# Altium PCB UZ_D_DSUB_Breakout.PcbDoc
Units mm, origin at the board's own origin, x right, y up, seen from the top; angles counter-clockwise.
Board outline 155.99 x 100.01 mm, 2 copper layers (Top Layer, Bottom Layer), stack 0.91 mm thick; 7 components, 52 nets, 152 pads, 134 vias.
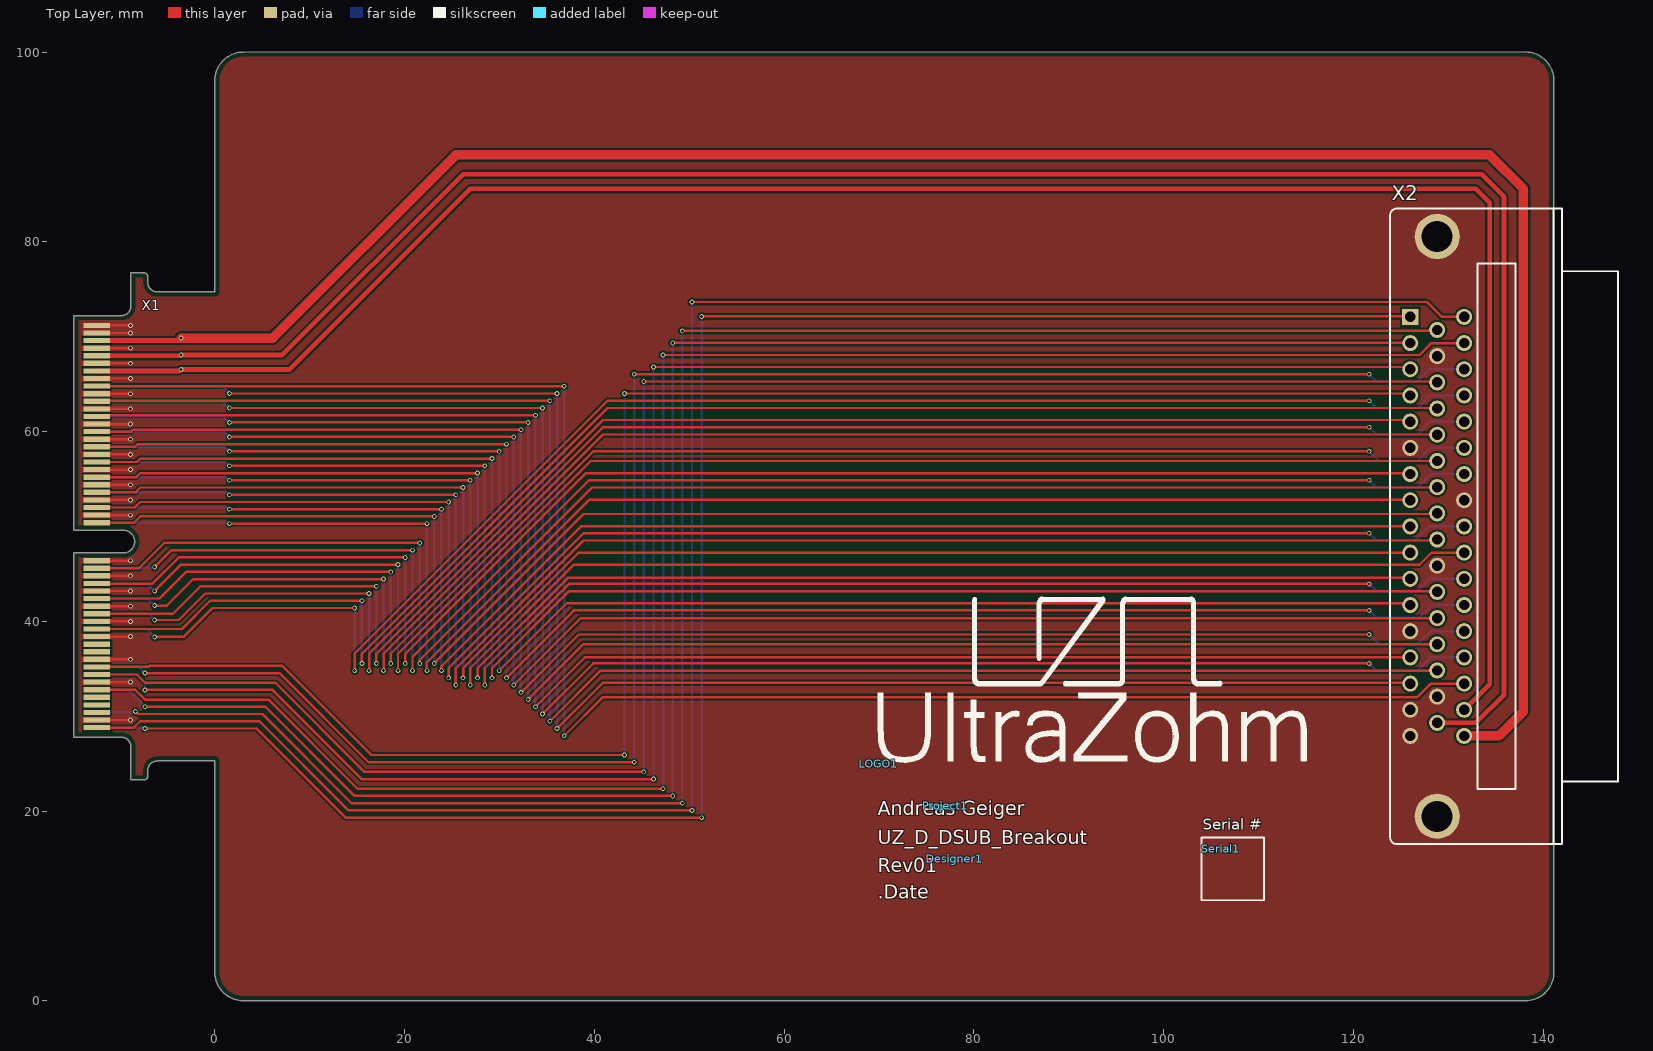
[diagram p0: Top Layer view]
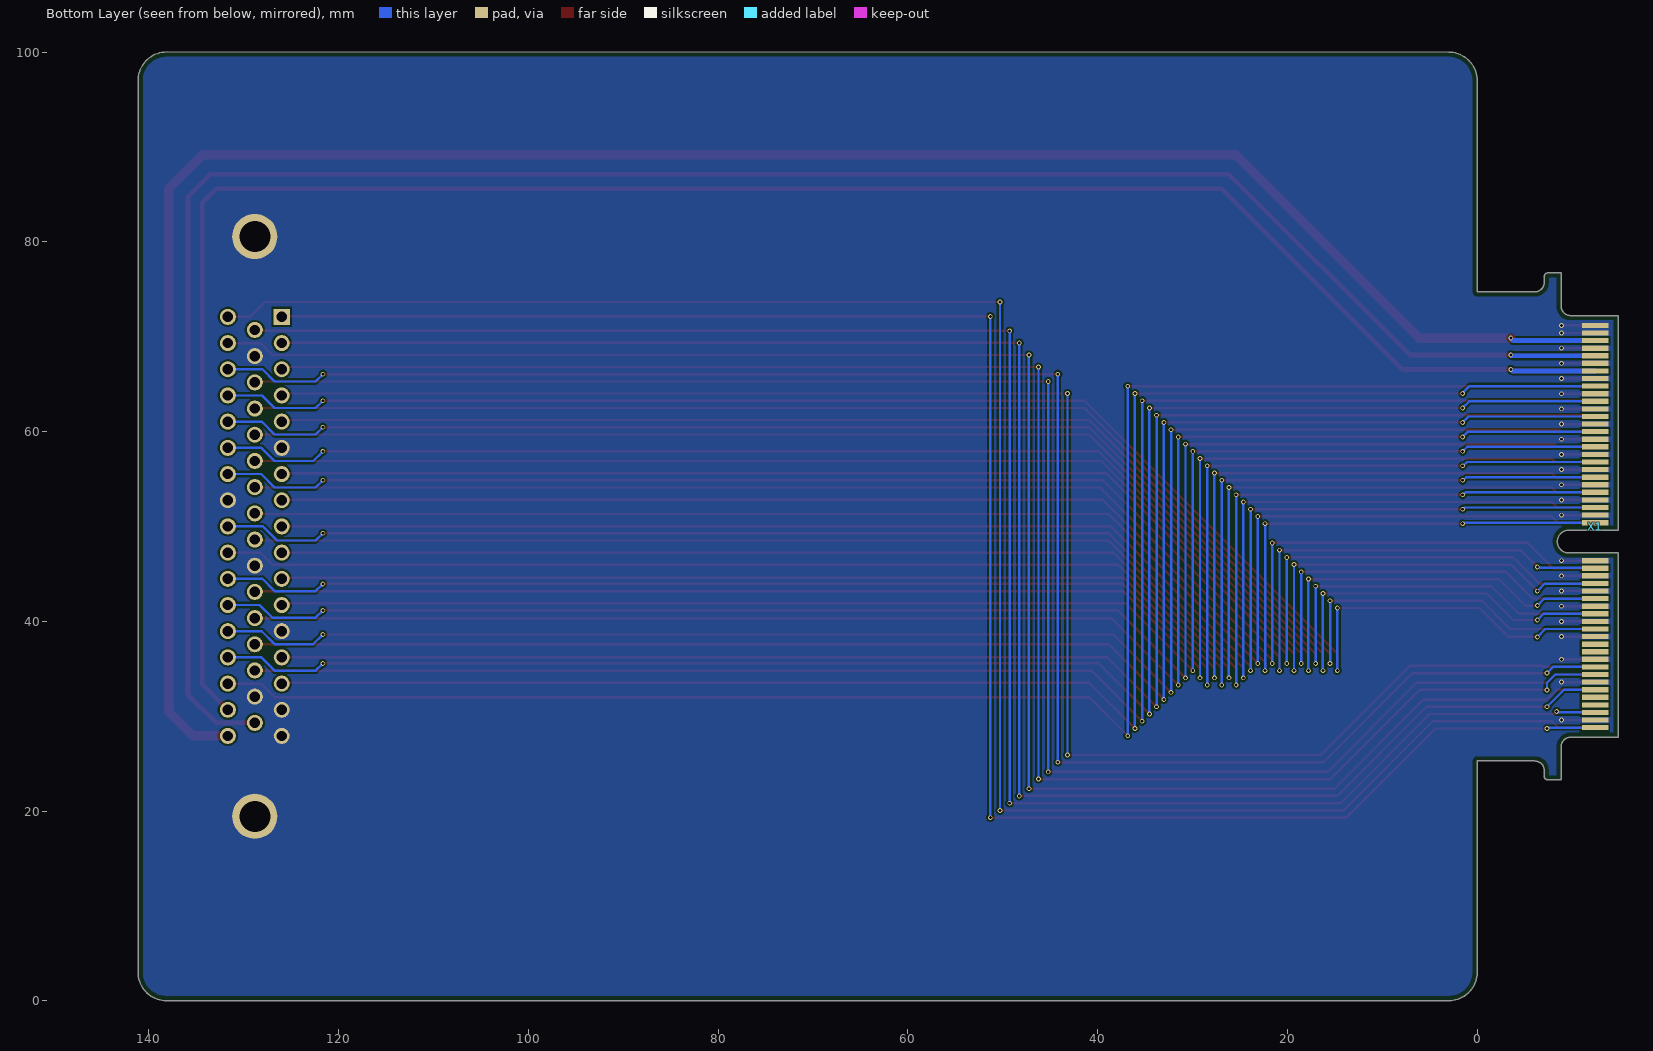
[diagram p1: Bottom Layer view, seen from below]

## Layer stack, top to bottom
Top Solder: solder mask 0.01, Solder Resist, Dk 3.5
Top Layer: signal copper 0.035
Dielectric 2: prepreg 0.115, FR-4, Dk 4.4
Dielectric 4: prepreg 0.115, FR-4, Dk 4.4
Dielectric 1: core 0.38, Core-036, Dk 4.4
Dielectric 5: prepreg 0.115, FR-4, Dk 4.4
Dielectric 3: prepreg 0.115, FR-4, Dk 4.4
Bottom Layer: signal copper 0.035
Bottom Solder: solder mask 0.01, Solder Resist, Dk 3.5

## Board outline
-14.853,27.775 -9.853,27.775 cw(c-9.853,26.775) -8.853,26.775 -8.853,23.275 -7.473,23.275 ccw(c-7.473,23.675) -7.073,23.675 -7.073,24.275 cw(c-6.073,24.275) -6.073,25.275 0,25.275 0,3 ccw(c3,3) 3,0 138.141,0 ccw(c138.141,3) 141.141,3 141.141,97 141.141,97.01 ccw(c138.141,97.01) 138.141,100.01 3,100 ccw(c3,97) 0,97 0,74.725 -6.073,74.725 cw(c-6.073,75.725) -7.073,75.725 -7.073,76.325 ccw(c-7.473,76.325) -7.473,76.725 -8.853,76.725 -8.853,73.225 cw(c-9.853,73.225) -9.853,72.225 -14.853,72.225 -14.853,49.6 -9.653,49.6 cw(c-9.653,48.4) -9.653,47.2 -14.853,47.2

## Design rules (kind name [scope] priority, off if disabled: settings)
BoardOutlineClearance BoardOutlineClearance_TopOverlay [OnLayer('Top Overlay') or OnLayer('Bottom Overlay')] p1: gap=0 ignorepadtopadclearanceinfootprint=FALSE
BoardOutlineClearance [All] p2: gap=0.508 ignorepadtopadclearanceinfootprint=FALSE except(0: Arc-SplitContinuation Track-SplitContinuation SMDPad-SplitContinuation THPad-SplitContinuation Via-SplitContinuation Fill-SplitContinuation Poly-SplitContinuation Region-SplitContinuation Text-OutlineEdge Text-CavityEdge Text-CutoutEdge Text-SplitBarrior Text-SplitContinuation; 0.254: SMDPad-OutlineEdge SMDPad-CavityEdge SMDPad-CutoutEdge SMDPad-SplitBarrior)
Clearance [All] p1: gap=0.2 ignorepadtopadclearanceinfootprint=FALSE except(0: Arc-Text Track-Text SMDPad-Text THPad-Text Via-Text Fill-Text Poly-Text Region-Text Text-Text Text-Hole; 0.127: Arc-Arc Arc-Track Track-Track SMDPad-SMDPad; 0.254: Arc-Via Track-Via; 0.5: THPad-THPad Via-Via)
ComponentClearance [All] p1: gap=0 collisioncheckmode=3 verticalgap=0 showdistances=FALSE
DiffPairsRouting [All] p1: maxlimit=0.127 minlimit=0.127 mostfreqgap=0.127 toplayer_minwidth=0.254 toplayer_maxwidth=0.254 toplayer_prefwidth=0.254 bottomlayer_minwidth=0.254 bottomlayer_maxwidth=0.254 bottomlayer_prefwidth=0.254 impedanceprofiledriven=TRUE impedanceprofileid={1E899714-F215-421E-BD83-15DB56C979E2} maxuncoupledlength=12.7
HoleSize [All] p1: absolutevalues=TRUE maxlimit=6.3 minlimit=0.2 maxpercent=80.000 minpercent=20.000
MatchedLengths [All] p1: tolerance=0.254 checknetsindiffpair=TRUE checkdiffpairvsdiffpair=FALSE checkxsignals=FALSE checkothers=FALSE
MinimumSolderMaskSliver [All] p1: minsoldermaskwidth=0.089
PlaneConnect [All] p1: pad.planeconnectstyle=Relief pad.reliefexpansion=0.508 pad.reliefentries=4 pad.reliefconductorwidth=0.254 pad.reliefairgap=0.254 via.planeconnectstyle=Direct via.reliefexpansion=0.508 via.reliefentries=4 via.reliefconductorwidth=0.254 via.reliefairgap=0.254
PolygonConnect PolygonConnect_GND [InNet('GND')] p1 off: thpad.connectstyle=Relief thpad.reliefconductorwidth=0.254 thpad.reliefentries=4 thpad.polygonreliefangle="90 Angle" thpad.airgapwidth=0.254 smdpad.connectstyle=Relief smdpad.reliefconductorwidth=0.254 smdpad.reliefentries=4 smdpad.polygonreliefangle="90 Angle" smdpad.airgapwidth=0.254 via.connectstyle=Direct via.reliefconductorwidth=0.254 via.reliefentries=4 via.polygonreliefangle="90 Angle" via.airgapwidth=0.254
PolygonConnect [All] p2: connectstyle=Direct reliefconductorwidth=0.254 reliefentries=4 polygonreliefangle="90 Angle" airgapwidth=0.127
RoomDefinition Component_UpperEdgeKeepOut [All] p1: confinementstyle=ConfineOut formatcopy=TRUE lockcomponents=FALSE outline 0,97 142,97 142,100 0,100
RoomDefinition Component_LowerEdgeKeepOut [All] p2: confinementstyle=ConfineOut formatcopy=TRUE lockcomponents=FALSE outline 0,0 142,0 142,3 0,3
RoutingVias [All] p1: holewidth=0.3 width=0.6 viastyle="Through Hole" minholewidth=0.2 minwidth=0.4 maxholewidth=0.8 maxwidth=1.6
SilkToSilkClearance [All] p1: silktosilkclearance=0
SilkToSolderMaskClearance [IsPad] p1: minsilkscreentomaskgap=0 clearancetoexposedcopper=TRUE
SolderMaskExpansion [All] p1: expansion=0.102 istentingtop=FALSE
Width width_s75 [InNetClass('S75')] p1 off: maxlimit=0.1 minlimit=0.1 preferedwidth=0.1 minimp=50.000000 maximp=50.000000 favimp=50.000000
Width [All] p2: maxlimit=10 minlimit=0.2 preferedwidth=0.254 minimp=50.000000 maximp=50.000000 favimp=50.000000
23 further rules are at their usual default settings.

## Classes and differential pairs
component class TopSheet: Designer1 LOGO1 Project1 Revision1 Serial1
component class U_DigitalConnector: X2
component class X1: X1

## Components (designator, comment, footprint, x,y, rotation, side; value= is the part's Value field where it differs from the comment)
Designer1 "Andreas Geiger" Designator:comment 77.978,14.986 r0 top
LOGO1 "UZ Logo" UZ_Logo_medium 70,25 r0 top
Project1 "UZ_D_DSUB_Breakout" COMMENT 76.962,20.574 r0 top
Revision1 "Rev01" Designator:comment 170.695,25.971 r90 top
Serial1 "Serial #" SERIAL 106,16 r0 top
X1 "HSEC8-150-01-XX-DV-A-BL-CARD" HSEC8-150-01-XX-DV-A-BL-CARD -14.84,49.991 r270 bottom
X2 "164A18759X" dsub50_female_164A18759X 126,27.912 r90 top

## Footprints (in the part's own frame and the unit in brackets; to place one, negate y for a bottom-side part, rotate by r counter-clockwise, add the part's x,y. Pads: shape width x height; smd on the part's side, far side on the other; paste and mask are expansions set on the pad)
COMMENT [mm] "prints out the comment of a component"
Designator:comment [mm] "prints out designator and comment of a component"
dsub50_female_164A18759X [mm]
  rect 1.69x1.69 hole 1.09: 1(44.176,0)
  round 1.69 hole 1.09: 2(41.415,0) 3(38.654,0) 4(35.893,0) 5(33.132,0) 6(30.371,0) 7(27.61,0) 8(24.849,0) 9(22.088,0) 10(19.327,0) 11(16.566,0) 12(13.805,0) 13(11.044,0) 14(8.283,0) 15(5.522,0) 16(2.761,0) 17(0,0) 18(42.795,-2.84) 19(40.035,-2.84) 20(37.274,-2.84) 21(34.512,-2.84) 22(31.752,-2.84) 23(28.99,-2.84) 24(26.23,-2.84) 25(23.469,-2.84) 26(20.707,-2.84) 27(17.947,-2.84) 28(15.185,-2.84) 29(12.425,-2.84) 30(9.664,-2.84) 31(6.902,-2.84) 32(4.142,-2.84) 33(1.38,-2.84) 34(44.176,-5.68) 35(41.415,-5.68) 36(38.654,-5.68) 37(35.893,-5.68) 38(33.132,-5.68) 39(30.371,-5.68) 40(27.61,-5.68) 41(24.849,-5.68) 42(22.088,-5.68) 43(19.327,-5.68) 44(16.566,-5.68) 45(13.805,-5.68) 46(11.044,-5.68) 47(8.283,-5.68) 48(5.522,-5.68) 49(2.761,-5.68) 50(0,-5.68)
  round 4.76 hole 3.26: 51(-8.467,-2.84) 52(52.643,-2.84)
  silkscreen extent -11.4,-21.9 55.6,2.12, body extent -11.42,-22.05 55.58,2.13, height 16.35
HSEC8-150-01-XX-DV-A-BL-CARD [mm]
  rect 0.55x2.8 smd far side mask+0.05: 1(-21.2,-2.4) 3(-20.4,-2.4) 5(-19.6,-2.4) 7(-18.8,-2.4) 9(-18,-2.4) 11(-17.2,-2.4) 13(-16.4,-2.4) 15(-15.6,-2.4) 17(-14.8,-2.4) 19(-14,-2.4) 21(-13.2,-2.4) 23(-12.4,-2.4) 25(-11.6,-2.4) 27(-10.8,-2.4) 29(-10,-2.4) 31(-9.2,-2.4) 33(-8.4,-2.4) 35(-7.6,-2.4) 37(-6.8,-2.4) 39(-6,-2.4) 41(-5.2,-2.4) 43(-4.4,-2.4) 45(-3.6,-2.4) 47(-2.8,-2.4) 49(-2,-2.4) 51(-1.2,-2.4) 53(-0.4,-2.4) 55(3.6,-2.4) 57(4.4,-2.4) 59(5.2,-2.4) 61(6,-2.4) 63(6.8,-2.4) 65(7.6,-2.4) 67(8.4,-2.4) 69(9.2,-2.4) 71(10,-2.4) 73(10.8,-2.4) 75(11.6,-2.4) 77(12.4,-2.4) 79(13.2,-2.4) 81(14,-2.4) 83(14.8,-2.4) 85(15.6,-2.4) 87(16.4,-2.4) 89(17.2,-2.4) 91(18,-2.4) 93(18.8,-2.4) 95(19.6,-2.4) 97(20.4,-2.4) 99(21.2,-2.4)
  rect 0.55x2.8 smd mask+0.05: 2(-21.2,-2.4) 4(-20.4,-2.4) 6(-19.6,-2.4) 8(-18.8,-2.4) 10(-18,-2.4) 12(-17.2,-2.4) 14(-16.4,-2.4) 16(-15.6,-2.4) 18(-14.8,-2.4) 20(-14,-2.4) 22(-13.2,-2.4) 24(-12.4,-2.4) 26(-11.6,-2.4) 28(-10.8,-2.4) 30(-10,-2.4) 32(-9.2,-2.4) 34(-8.4,-2.4) 36(-7.6,-2.4) 38(-6.8,-2.4) 40(-6,-2.4) 42(-5.2,-2.4) 44(-4.4,-2.4) 46(-3.6,-2.4) 48(-2.8,-2.4) 50(-2,-2.4) 52(-1.2,-2.4) 54(-0.4,-2.4) 56(3.6,-2.4) 58(4.4,-2.4) 60(5.2,-2.4) 62(6,-2.4) 64(6.8,-2.4) 66(7.6,-2.4) 68(8.4,-2.4) 70(9.2,-2.4) 72(10,-2.4) 74(10.8,-2.4) 76(11.6,-2.4) 78(12.4,-2.4) 80(13.2,-2.4) 82(14,-2.4) 84(14.8,-2.4) 86(15.6,-2.4) 88(16.4,-2.4) 90(17.2,-2.4) 92(18,-2.4) 94(18.8,-2.4) 96(19.6,-2.4) 98(20.4,-2.4) 100(21.2,-2.4)
SERIAL [mm]
  silkscreen extent -2,-5.4 4.6,1.2
UZ_Logo_medium [mm] "logo width 4.5cm"
  silkscreen extent -0.1,0.17 45.04,17.54

## Part data
Designer1: library part 4, "Create a project parameter named \"Author\" this is the value of this component. It is printed on the PCB. Once the parameter is updated (e.g. new revision) it gets updated on the PCB as well", Manufacturer="PCB Manufacturer", Manufacturer Part Number="Project Author", Component Type="Project Author", Created from="T. Wendt", Created On="01.03.2021 08:53:41", Last Updated="01.03.2021 09:20:27", Live Cycle Status=1, PartID=4, Type="Standard (No BOM)"
LOGO1: library part 1, "Official Project Logo of the UltraZohm", Manufacturer="PCB Manufacturer", Manufacturer Part Number="UltraZohm Logo", Component Type=Logo, ComponentLink1Description=Homepage, ComponentLink1URL=https://ultrazohm.com, Created from="T. Wendt", Created On="19.02.2021 16:55:56", Last Updated="02.03.2021 14:31:24", Live Cycle Status=1, PartID=1, Type="Standard (No BOM)"
Project1: library part 2, "Create a project parameter named \"ProjectNameCustom\" this is the value of this component and it is printed on the PCB.", Manufacturer="PCB Manufacturer", Manufacturer Part Number="Project Name", Component Type="Project Name", Created from="T. Wendt", Created On="01.03.2021 08:43:57", Last Updated="01.03.2021 09:07:27", Live Cycle Status=1, PartID=2, Type="Standard (No BOM)"
Revision1: library part 3, "Create a project parameter named \"ProjectRevision\" this is the value of this component. It is printed on the PCB. Once the parameter is updated (e.g. new revision) it gets updated on the PCB as well", Manufacturer="PCB Manufacturer", Manufacturer Part Number="Project Revision", Component Type="Project Revision", Created from="T. Wendt", Created On="01.03.2021 08:50:34", Last Updated="01.03.2021 09:28:36", Live Cycle Status=1, PartID=3, Type="Standard (No BOM)"
Serial1: library part 6, "Field to put in a serial number", Manufacturer="PCB Manufacturer", Manufacturer Part Number="Serial Number", Component Type="Serial Number", Created from="T. Wendt", Created On="02.03.2021 14:31:24", Last Updated="02.03.2021 14:31:24", Live Cycle Status=1, PartID=6, Type="Standard (No BOM)"
X1: "Mating Card Layout for HSEC8-150-01-XX-DV-A-BL", Device Package="PCB Shape", Manufacturer=SAMTEC, Supplier Part Number 1=NA, Category=SAMTEC, Component Type="Board to Board Connector", ComponentLink1Description=Homepage, ComponentLink1URL=https://www.samtec.com/products/hsec8-dp, Created=2018_04_23_AGeiger, Created from="T. Wendt", Created On="26.02.2021 16:36:12", Last Updated="26.02.2021 16:37:20", Live Cycle Status=1, Manufacturer Part Number=HSEC8-150-01-XX-DV-A-BL-CARD, Mounting Type="PCB Shape", Number of positions=100, Number of rows=2, PartID=2, Series=HSEC8, Stock number="not stored", Supplier 1=SAMTEC, Type="Board to Board Connector"
X2: "D-Sub Standard Connectors DSUB SOLDER PIN ANG 9.4mm", Manufacturer=CONEC, Operating Temperature="-55 °C to +125 °C", Supplier Part Number 1="D-SUB BU 50GWC", ComponentLink1Description=Datasheet, ComponentLink1URL=https://conec.com/catalog/pub/media/conec/drawings/164A18759X.pdf, Created=2019_10_24_AGeiger, Created from=AGeiger, Created On="22.12.2022 17:03:01", Last Updated="22.12.2022 17:05:07", Manufacturer Part Number=164A18759X, MF=CONEC, Mounting Type=THT, MPN=164A18759X, PartID=2, Series="D-SUB Standard", Supplier 1=Reichelt, Supplier 2=Mouser, Supplier 3=Digi-Key, Supplier Part Number 2=706-164A18759X, Supplier Part Number 3=164A18759X-ND

## Via types
v1: diameter 0.5, hole 0.3, Top Layer to Bottom Layer, 134 vias

## Nets (pads, with @x,y where several pads share a name; then routed paths per layer and width w, separated by ;. In a path a pad name is that pad's centre, name@x,y a point inside that pad or via, vN(x,y) a via of type N, cw(c..) or ccw(c..) an arc to the next point about the centre after c; other vN are vias at no path point)
3V3_PER: X1.13 X1.14 X2.49 | length 218.9
  Top Layer w0.5: X1.13 -3.713,66.391 v1(-3.556,66.548) 7.874,66.548 26.924,85.598 132.893,85.598 134.366,84.125 134.366,33.359 X2.49
  Bottom Layer w0.5: X1.14 -3.713,66.391 v1(-3.556,66.548)
5V_PER: X1.9 X1.10 X2.33 | length 226.9
  Top Layer w0.5: X1.9 -3.637,67.991 v1(-3.556,68.072) 7.112,68.072 26.162,87.122 133.524,87.122 135.89,84.756 135.89,32.258 132.924,29.292 X2.33
  Bottom Layer w0.5: X1.10 -3.637,67.991 v1(-3.556,68.072)
Collective_FLT: X1.96 X2.18 | length 195.1
  Top Layer w0.254: v1(-8.382,30.48) -8.364,30.48 -8.11,30.226 5.008,30.226 14.406,20.828 v1(49.276,20.828) ; v1(49.276,70.612) 128.744,70.612 X2.18
  Bottom Layer w0.254: X1.96 -8.538,30.391 -8.449,30.48 v1(-8.382,30.48) ; v1(49.276,20.828) 49.276,61.976 v1(49.276,70.612)
CPLD_DigIn_01: X1.83 X2.4 | length 180.6
  Top Layer w0.254: X1.83 -6.973,35.191 -6.858,35.306 7.112,35.306 16.51,25.908 v1(43.18,25.908) ; v1(43.18,64.008) 82.55,64.008 125.797,64.008 X2.4
  Bottom Layer w0.254: v1(43.18,25.908) v1(43.18,64.008)
CPLD_DigIn_02: X1.85 X2.20 | length 186.7
  Top Layer w0.254: X1.85 -8.229,34.391 -7.366,33.528 6.376,33.528 15.774,24.13 v1(45.212,24.13) ; v1(45.212,65.278) 128.748,65.278 X2.20
  Bottom Layer w0.254: v1(45.212,24.13) 45.212,61.976 v1(45.212,65.278)
CPLD_DigOut_01: X1.84 X2.36 | length 190
  Top Layer w0.254: v1(-7.366,34.544) 6.796,34.544 16.194,25.146 v1(44.196,25.146) ; v1(44.196,66.04) v1(121.666,66.04)
  Bottom Layer w0.254: X1.84 -8.013,35.191 v1(-7.366,34.544) ; v1(44.196,25.146) 44.196,61.976 v1(44.196,66.04) ; v1(121.666,66.04) 122.428,65.278 126.746,65.278 128.034,66.566 X2.36
CPLD_DigOut_02: X1.86 X2.3 | length 187
  Top Layer w0.254: v1(-7.366,32.766) 6.06,32.766 15.458,23.368 v1(46.228,23.368) ; v1(46.228,66.802) 125.764,66.802 X2.3
  Bottom Layer w0.254: X1.86 -8.229,34.391 -7.366,33.528 v1(-7.366,32.766) ; v1(46.228,23.368) 46.228,61.976 v1(46.228,66.802)
DIG_IO_00: X1.17 X2.48 | length 183.2
  Top Layer w0.254: X1.17 36.809,64.791 v1(36.83,64.77) ; v1(36.83,27.94) 40.894,32.004 82.55,32.004 126.746,32.004 128.176,33.434 X2.48
  Bottom Layer w0.254: v1(36.83,27.94) v1(36.83,64.77)
DIG_IO_01: X1.18 X2.15 | length 176.1
  Top Layer w0.254: v1(1.524,64.008) v1(36.068,64.008) ; v1(36.068,28.702) 40.894,33.528 82.55,33.528 125.906,33.528 X2.15
  Bottom Layer w0.254: X1.18 0.808,64.791 1.524,64.075 v1(1.524,64.008) ; v1(36.068,28.702) v1(36.068,64.008)
DIG_IO_02: X1.21 X2.31 | length 177.3
  Top Layer w0.254: X1.21 -12.385,63.246 v1(35.306,63.246) ; v1(35.306,29.464) 40.64,34.798 82.55,34.798 128.823,34.798 X2.31
  Bottom Layer w0.254: v1(35.306,29.464) v1(35.306,63.246)
DIG_IO_03: X1.22 X2.47 | length 179.8
  Top Layer w0.254: v1(1.524,62.484) v1(34.544,62.484) ; v1(34.544,30.226) 39.878,35.56 82.55,35.56 v1(121.666,35.56)
  Bottom Layer w0.254: X1.22 0.817,63.191 v1(1.524,62.484) ; v1(34.544,30.226) v1(34.544,62.484) ; v1(121.666,35.56) 122.428,34.798 126.746,34.798 128.143,36.195 X2.47
DIG_IO_04: X1.25 X2.14 | length 171.4
  Top Layer w0.254: X1.25 -12.309,61.722 v1(33.782,61.722) ; v1(33.782,30.988) 38.989,36.195 X2.14
  Bottom Layer w0.254: v1(33.782,30.988) v1(33.782,61.722)
DIG_IO_05: X1.26 X2.30 | length 173.2
  Top Layer w0.254: v1(1.524,60.96) v1(33.02,60.96) ; v1(33.02,31.75) 38.862,37.592 128.824,37.592 X2.30
  Bottom Layer w0.254: X1.26 0.893,61.591 v1(1.524,60.96) ; v1(33.02,31.75) v1(33.02,60.96)
DIG_IO_06: X1.29 X2.46 | length 175.4
  Top Layer w0.254: X1.29 -8.836,59.991 -8.629,60.198 v1(32.258,60.198) ; v1(32.258,32.512) 38.354,38.608 v1(121.666,38.608)
  Bottom Layer w0.254: v1(32.258,32.512) v1(32.258,60.198) ; v1(121.666,38.608) 122.682,37.592 126.746,37.592 128.11,38.956 X2.46
DIG_IO_07: X1.30 X2.29 | length 170.6
  Top Layer w0.254: v1(1.524,59.436) v1(31.496,59.436) ; v1(31.496,33.274) 38.559,40.337 X2.29
  Bottom Layer w0.254: X1.30 0.969,59.991 v1(1.524,59.436) ; v1(31.496,33.274) v1(31.496,59.436)
DIG_IO_08: X1.33 X2.45 | length 172.7
  Top Layer w0.254: X1.33 -8.411,58.391 -8.128,58.674 v1(30.734,58.674) ; v1(30.734,34.036) 37.846,41.148 v1(121.666,41.148)
  Bottom Layer w0.254: v1(30.734,34.036) v1(30.734,58.674) ; v1(121.666,41.148) 122.428,40.386 127,40.386 128.331,41.717 X2.45
DIG_IO_09: X1.34 X2.12 | length 164.8
  Top Layer w0.254: v1(1.524,57.912) v1(29.972,57.912) ; v1(29.972,34.798) 37.084,41.91 125.807,41.91 X2.12
  Bottom Layer w0.254: X1.34 1.045,58.391 v1(1.524,57.912) ; v1(29.972,34.798) v1(29.972,57.912)
DIG_IO_10: X1.37 X2.28 | length 169
  Top Layer w0.254: X1.37 -8.233,56.791 -7.874,57.15 v1(29.21,57.15) ; v1(29.21,34.036) 29.21,35.052 37.338,43.18 128.757,43.18 X2.28
  Bottom Layer w0.254: v1(29.21,34.036) v1(29.21,57.15)
DIG_IO_11: X1.38 X2.44 | length 173.7
  Top Layer w0.254: v1(1.524,56.388) v1(28.448,56.388) ; v1(28.448,33.274) 28.448,35.052 37.338,43.942 v1(121.666,43.942)
  Bottom Layer w0.254: X1.38 1.054,56.791 1.457,56.388 v1(1.524,56.388) ; v1(28.448,33.274) v1(28.448,56.388) ; v1(121.666,43.942) 122.428,43.18 126.746,43.18 128.044,44.478 X2.44
DIG_IO_12: X1.41 X2.11 | length 165.2
  Top Layer w0.254: X1.41 -8.309,55.191 -7.874,55.626 v1(27.686,55.626) ; v1(27.686,34.036) 27.686,35.052 37.207,44.573 125.905,44.573 X2.11
  Bottom Layer w0.254: v1(27.686,34.036) v1(27.686,55.626)
DIG_IO_13: X1.42 X2.43 | length 172.7
  Top Layer w0.254: v1(1.524,54.864) v1(26.924,54.864) ; v1(26.924,33.274) 26.924,35.052 37.846,45.974 127,45.974 128.265,47.239 X2.43
  Bottom Layer w0.254: X1.42 1.13,55.191 1.457,54.864 v1(1.524,54.864) ; v1(26.924,33.274) v1(26.924,54.864)
DIG_IO_14: X1.45 X2.10 | length 164.8
  Top Layer w0.254: X1.45 -8.385,53.591 -7.874,54.102 v1(26.162,54.102) ; v1(26.162,34.036) 26.162,35.052 38.354,47.244 125.995,47.244 X2.10
  Bottom Layer w0.254: v1(26.162,34.036) v1(26.162,54.102)
DIG_IO_15: X1.46 X2.26 | length 168.8
  Top Layer w0.254: v1(1.524,53.34) v1(25.4,53.34) ; v1(25.4,33.274) 25.4,35.052 38.862,48.514 128.734,48.514 X2.26
  Bottom Layer w0.254: X1.46 1.206,53.591 1.457,53.34 v1(1.524,53.34) ; v1(25.4,33.274) v1(25.4,53.34)
DIG_IO_16: X1.49 X2.42 | length 170.7
  Top Layer w0.254: X1.49 -8.461,51.991 -7.874,52.578 v1(24.638,52.578) ; v1(24.638,34.036) 24.638,35.052 38.862,49.276 v1(121.666,49.276)
  Bottom Layer w0.254: v1(24.638,34.036) v1(24.638,52.578) ; v1(121.666,49.276) 122.428,48.514 126.492,48.514 127.978,50 X2.42
DIG_IO_17: X1.50 X2.9 | length 162.1
  Top Layer w0.254: v1(1.524,51.816) v1(23.876,51.816) ; v1(23.876,34.798) 23.876,35.255 38.659,50.038 125.962,50.038 X2.9
  Bottom Layer w0.254: X1.50 1.282,51.991 1.457,51.816 v1(1.524,51.816) ; v1(23.876,34.798) v1(23.876,51.816)
DIG_IO_18: X1.53 X2.25 | length 163.6
  Top Layer w0.254: X1.53 -8.537,50.391 -7.874,51.054 v1(23.114,51.054) ; v1(23.114,35.56) 38.862,51.308 128.767,51.308 X2.25
  Bottom Layer w0.254: v1(23.114,35.56) v1(23.114,51.054)
DIG_IO_19: X1.54 X2.8 | length 162
  Top Layer w0.254: v1(1.524,50.292) v1(22.352,50.292) ; v1(22.352,34.798) 22.352,35.69 39.494,52.832 125.929,52.832 X2.8
  Bottom Layer w0.254: X1.54 1.358,50.391 1.457,50.292 v1(1.524,50.292) ; v1(22.352,34.798) v1(22.352,50.292)
DIG_IO_20: X1.57 X2.24 | length 163
  Top Layer w0.254: X1.57 -8.003,45.591 -5.334,48.26 v1(21.59,48.26) ; v1(21.59,35.56) 21.599,35.569 21.599,35.936 24.074,38.41 39.765,54.102 128.8,54.102 X2.24
  Bottom Layer w0.254: v1(21.59,35.56) v1(21.59,48.26)
DIG_IO_21: X1.58 X2.40 | length 167.7
  Top Layer w0.254: v1(-6.35,45.72) -4.572,47.498 v1(20.828,47.498) ; v1(20.828,34.798) 20.828,36.242 23.535,38.949 39.45,54.864 v1(121.666,54.864)
  Bottom Layer w0.254: X1.58 -12.373,45.658 -6.478,45.658 -6.417,45.72 v1(-6.35,45.72) ; v1(20.828,34.798) v1(20.828,47.498) ; v1(121.666,54.864) 122.428,54.102 126.746,54.102 128.166,55.522 X2.40
DIG_IO_22: X1.61 X2.7 | length 159.7
  Top Layer w0.254: X1.61 -12.416,43.966 -6.58,43.966 -3.81,46.736 v1(20.066,46.736) ; v1(20.066,35.56) 20.066,36.558 22.996,39.488 39.134,55.626 125.896,55.626 X2.7
  Bottom Layer w0.254: v1(20.066,35.56) v1(20.066,46.736)
DIG_IO_23: X1.62 X2.23 | length 164.1
  Top Layer w0.254: v1(-6.35,43.18) -3.556,45.974 v1(19.304,45.974) ; v1(19.304,34.798) 19.304,36.576 39.624,56.896 128.833,56.896 X2.23
  Bottom Layer w0.254: X1.62 -12.416,43.966 -7.136,43.966 v1(-6.35,43.18) ; v1(19.304,34.798) v1(19.304,45.974)
DIG_IO_24: X1.65 X2.39 | length 165.8
  Top Layer w0.254: X1.65 -12.427,42.404 -5.856,42.404 -3.048,45.212 v1(18.542,45.212) ; v1(18.542,35.56) 18.542,36.576 39.878,57.912 v1(121.666,57.912)
  Bottom Layer w0.254: v1(18.542,35.56) v1(18.542,45.212) ; v1(121.666,57.912) 122.682,56.896 126.746,56.896 128.133,58.283 X2.39
DIG_IO_25: X1.66 X2.22 | length 163.8
  Top Layer w0.254: v1(-6.35,41.656) -5.08,41.656 -2.286,44.45 v1(17.78,44.45) ; v1(17.78,34.798) 17.78,36.576 40.894,59.69 128.813,59.69 X2.22
  Bottom Layer w0.254: X1.66 -7.085,42.391 v1(-6.35,41.656) ; v1(17.78,34.798) v1(17.78,44.45)
DIG_IO_26: X1.69 X2.38 | length 165.2
  Top Layer w0.254: X1.69 -4.421,40.791 -1.524,43.688 v1(17.018,43.688) ; v1(17.018,35.56) 17.018,36.576 40.894,60.452 v1(121.666,60.452)
  Bottom Layer w0.254: v1(17.018,35.56) v1(17.018,43.688) ; v1(121.666,60.452) 122.428,59.69 126.746,59.69 128.1,61.044 X2.38
DIG_IO_27: X1.70 X2.5 | length 160.1
  Top Layer w0.254: v1(-6.35,40.132) -3.81,40.132 -1.016,42.926 v1(16.256,42.926) ; v1(16.256,34.798) 16.256,36.576 40.894,61.214 125.83,61.214 X2.5
  Bottom Layer w0.254: X1.70 -7.009,40.791 v1(-6.35,40.132) ; v1(16.256,34.798) v1(16.256,42.926)
DIG_IO_28: X1.73 X2.21 | length 160.9
  Top Layer w0.254: X1.73 -3.481,39.191 -0.508,42.164 v1(15.494,42.164) ; v1(15.494,35.56) 15.494,36.576 41.402,62.484 128.78,62.484 X2.21
  Bottom Layer w0.254: v1(15.494,35.56) v1(15.494,42.164)
DIG_IO_29: X1.74 X2.37 | length 166
  Top Layer w0.254: v1(-6.35,38.354) -3.302,38.354 -0.254,41.402 v1(14.732,41.402) ; v1(14.732,34.798) 14.732,36.576 41.402,63.246 v1(121.666,63.246)
  Bottom Layer w0.254: X1.74 -7.187,39.191 v1(-6.35,38.354) ; v1(14.732,34.798) v1(14.732,41.402) ; v1(121.666,63.246) 122.428,62.484 126.746,62.484 128.067,63.805 X2.37
DIG_Res_00: X1.78
DIG_Res_01: X1.79
DIG_Res_02: X1.80
DIG_Res_03: X1.91
DIG_Res_04: X1.92
DIG_Res_05: X1.93
DIG_Res_06: X1.94
DIG_Res_07: X1.95
DIG_Res_08: X1.77
GND: X1.1 X1.2 X1.3 X1.4 X1.7 X1.8 X1.11 X1.12 X1.15 X1.16 X1.19 X1.20 X1.23 X1.24 X1.27 X1.28 X1.31 X1.32 X1.35 X1.36 X1.39 X1.40 X1.43 X1.44 X1.47 X1.48 X1.51 X1.52 X1.55 X1.56 X1.59 X1.60 X1.63 X1.64 X1.67 X1.68 X1.71 X1.72 X1.75 X1.76 X1.81 X1.82 X1.87 X1.88 X1.97 X1.98 X2.6 X2.13 X2.16 X2.17 X2.19 X2.27 X2.32 X2.41 X2.51 X2.52 | length 81.8
  Top Layer w0.254: X1.97 v1(-8.884,29.591) ; X1.87 v1(-8.884,33.591) ; X1.81 v1(-8.884,35.991) ; X1.75 v1(-8.884,38.391) ; X1.71 v1(-8.884,39.991) ; X1.67 v1(-8.884,41.591) ; X1.63 v1(-8.884,43.191) ; X1.59 v1(-8.884,44.791) ; X1.55 v1(-8.884,46.391) ; X1.51 v1(-8.884,51.191) ; X1.47 v1(-8.884,52.791) ; X1.43 v1(-8.884,54.391) ; X1.39 v1(-8.884,55.991) ; X1.35 v1(-8.884,57.591) ; X1.31 v1(-8.884,59.191) ; X1.27 v1(-8.884,60.791) ; X1.23 v1(-8.884,62.391) ; X1.19 v1(-8.884,63.991) ; X1.15 v1(-8.884,65.591) ; X1.11 v1(-8.884,67.191) ; X1.7 v1(-8.884,68.791) ; X1.3 v1(-8.884,70.391) ; X1.1 v1(-8.884,71.191)
PILOT_IN: X1.100 X2.1 | length 195.2
  Top Layer w0.254: v1(-7.366,28.702) 4.377,28.702 13.775,19.304 v1(51.308,19.304) ; v1(51.308,72.136) 125.952,72.136 X2.1
  Bottom Layer w0.254: X1.100 -7.522,28.791 -7.433,28.702 v1(-7.366,28.702) ; v1(51.308,19.304) 51.308,61.976 v1(51.308,72.136)
PILOT_OUT: X1.99 X2.34 | length 202.5
  Top Layer w0.254: X1.99 -8.547,28.791 -7.874,29.464 4.692,29.464 14.09,20.066 v1(50.292,20.066) ; v1(50.292,73.66) 127.762,73.66 129.334,72.088 X2.34
  Bottom Layer w0.254: v1(50.292,20.066) 50.292,61.976 v1(50.292,73.66)
PS_I2C0_shared_SCL: X1.89 X2.35 | length 194.7
  Top Layer w0.254: X1.89 -8.407,32.791 -7.366,31.75 5.639,31.75 15.037,22.352 v1(47.244,22.352) ; v1(47.244,68.072) 127,68.072 128.255,69.327 X2.35
  Bottom Layer w0.254: v1(47.244,22.352) 47.244,61.976 v1(47.244,68.072)
PS_I2C0_shared_SDA: X1.90 X2.2 | length 190.8
  Top Layer w0.254: v1(-7.366,30.988) 5.323,30.988 14.721,21.59 v1(48.26,21.59) ; v1(48.26,69.342) X2.2@125.985,69.342
  Bottom Layer w0.254: X1.90 -9.169,32.791 v1(-7.366,30.988) ; v1(48.26,21.59) 48.26,61.976 v1(48.26,69.342)
VIN: X1.5 X1.6 X2.50 | length 231.4
  Top Layer w0.5: X1.5 -3.815,69.591 v1(-3.556,69.85)
  Top Layer w1: v1(-3.556,69.85) 6.096,69.85 25.4,89.154 134.366,89.154 137.922,85.598 137.922,30.48 135.354,27.912 X2.50
  Bottom Layer w0.5: X1.6 -3.815,69.591 v1(-3.556,69.85)

## Polygon pours and split planes (outlines as drawn)
GND on Top Layer "GND_L01_P000" (solid, remove dead copper, pour order 0): -14.853,27.775 -9.853,27.775 cw(c-9.853,26.775) -8.853,26.775 -8.853,23.275 -7.473,23.275 ccw(c-7.473,23.675) -7.073,23.675 -7.073,24.275 cw(c-6.073,24.275) -6.073,25.275 0,25.275 0,3 ccw(c3,3) 3,0 138.141,0 ccw(c138.141,3) 141.141,3 141.141,97 141.141,97.01 ccw(c138.141,97.01) 138.141,100.01 3,100 ccw(c3,97) 0,97 0,74.725 -6.073,74.725 cw(c-6.073,75.725) -7.073,75.725 -7.073,76.325 ccw(c-7.473,76.325) -7.473,76.725 -8.853,76.725 -8.853,73.225 cw(c-9.853,73.225) -9.853,72.225 -14.853,72.225 -14.853,49.6 -9.653,49.6 cw(c-9.653,48.4) -9.653,47.2 -14.853,47.2
GND on Bottom Layer "GND_L02_P001" (solid, remove dead copper, pour order 1): -14.853,27.775 -9.853,27.775 cw(c-9.853,26.775) -8.853,26.775 -8.853,23.275 -7.473,23.275 ccw(c-7.473,23.675) -7.073,23.675 -7.073,24.275 cw(c-6.073,24.275) -6.073,25.275 0,25.275 0,3 ccw(c3,3) 3,0 138.141,0 ccw(c138.141,3) 141.141,3 141.141,97 141.141,97.01 ccw(c138.141,97.01) 138.141,100.01 3,100 ccw(c3,97) 0,97 0,74.725 -6.073,74.725 cw(c-6.073,75.725) -7.073,75.725 -7.073,76.325 ccw(c-7.473,76.325) -7.473,76.725 -8.853,76.725 -8.853,73.225 cw(c-9.853,73.225) -9.853,72.225 -14.853,72.225 -14.853,49.6 -9.653,49.6 cw(c-9.653,48.4) -9.653,47.2 -14.853,47.2

## Silkscreen, mask and mechanical layers (free items; w line width, h text height)
Top Overlay:
  text ".Date" at 69.85,10.208 h2.5
Mechanical 1:
  lines w0.1: 141.141,97 141.141,3 cw(c138.141,3) 138.141,0 3,0 cw(c3,3) 0,3 0,25.275 -6.073,25.275 ccw(c-6.073,24.275) -7.073,24.275 -7.073,23.675 cw(c-7.473,23.675) -7.473,23.275 -8.853,23.275 -8.853,26.775 ccw(c-9.853,26.775) -9.853,27.775 -14.853,27.775 -14.853,47.2 -9.653,47.2 ccw(c-9.653,48.4) -9.653,49.6 -14.853,49.6 -14.853,72.225 -9.853,72.225 ccw(c-9.853,73.225) -8.853,73.225 -8.853,76.725 -7.473,76.725 cw(c-7.473,76.325) -7.073,76.325 -7.073,75.725 ccw(c-6.073,75.725) -6.073,74.725 0,74.725 0,97 cw(c3,97) 3,100 138.141,100.01 cw(c138.141,97.01) 141.141,97.01

## Dimensions
141.141,0 to 141.141,100 on Mechanical 2
146.143,97.802 to -14.84,72.216 on Mechanical 2
141.141,100 to -14.853,72.225 on Mechanical 2
141.141,100 to 0.031,100 on Mechanical 2